# Altium PCB Master.PcbDoc
Units mil, origin at the board's own origin, x right, y up, seen from the top; angles counter-clockwise.
Board outline 6000 x 4000 mil, 2 copper layers (Top Layer, Bottom Layer); 26 components, 32 nets, 130 pads, 0 vias.
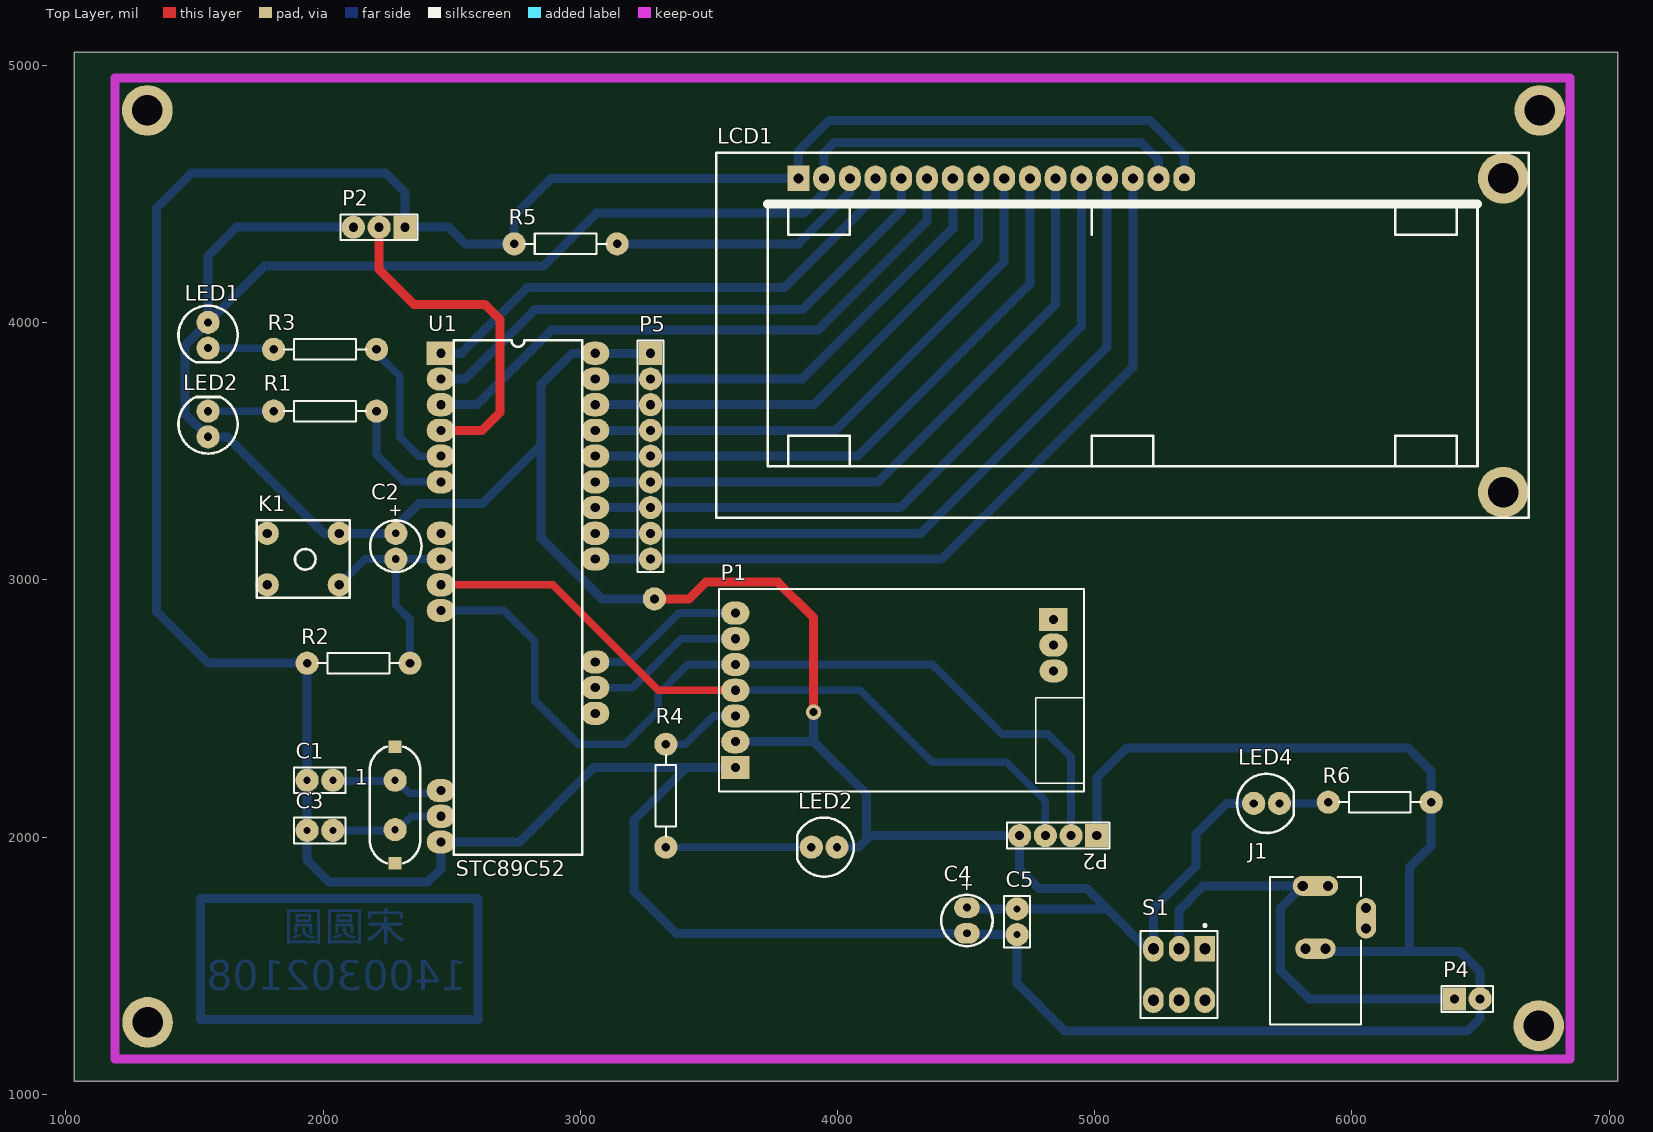
[diagram p0: Top Layer view]
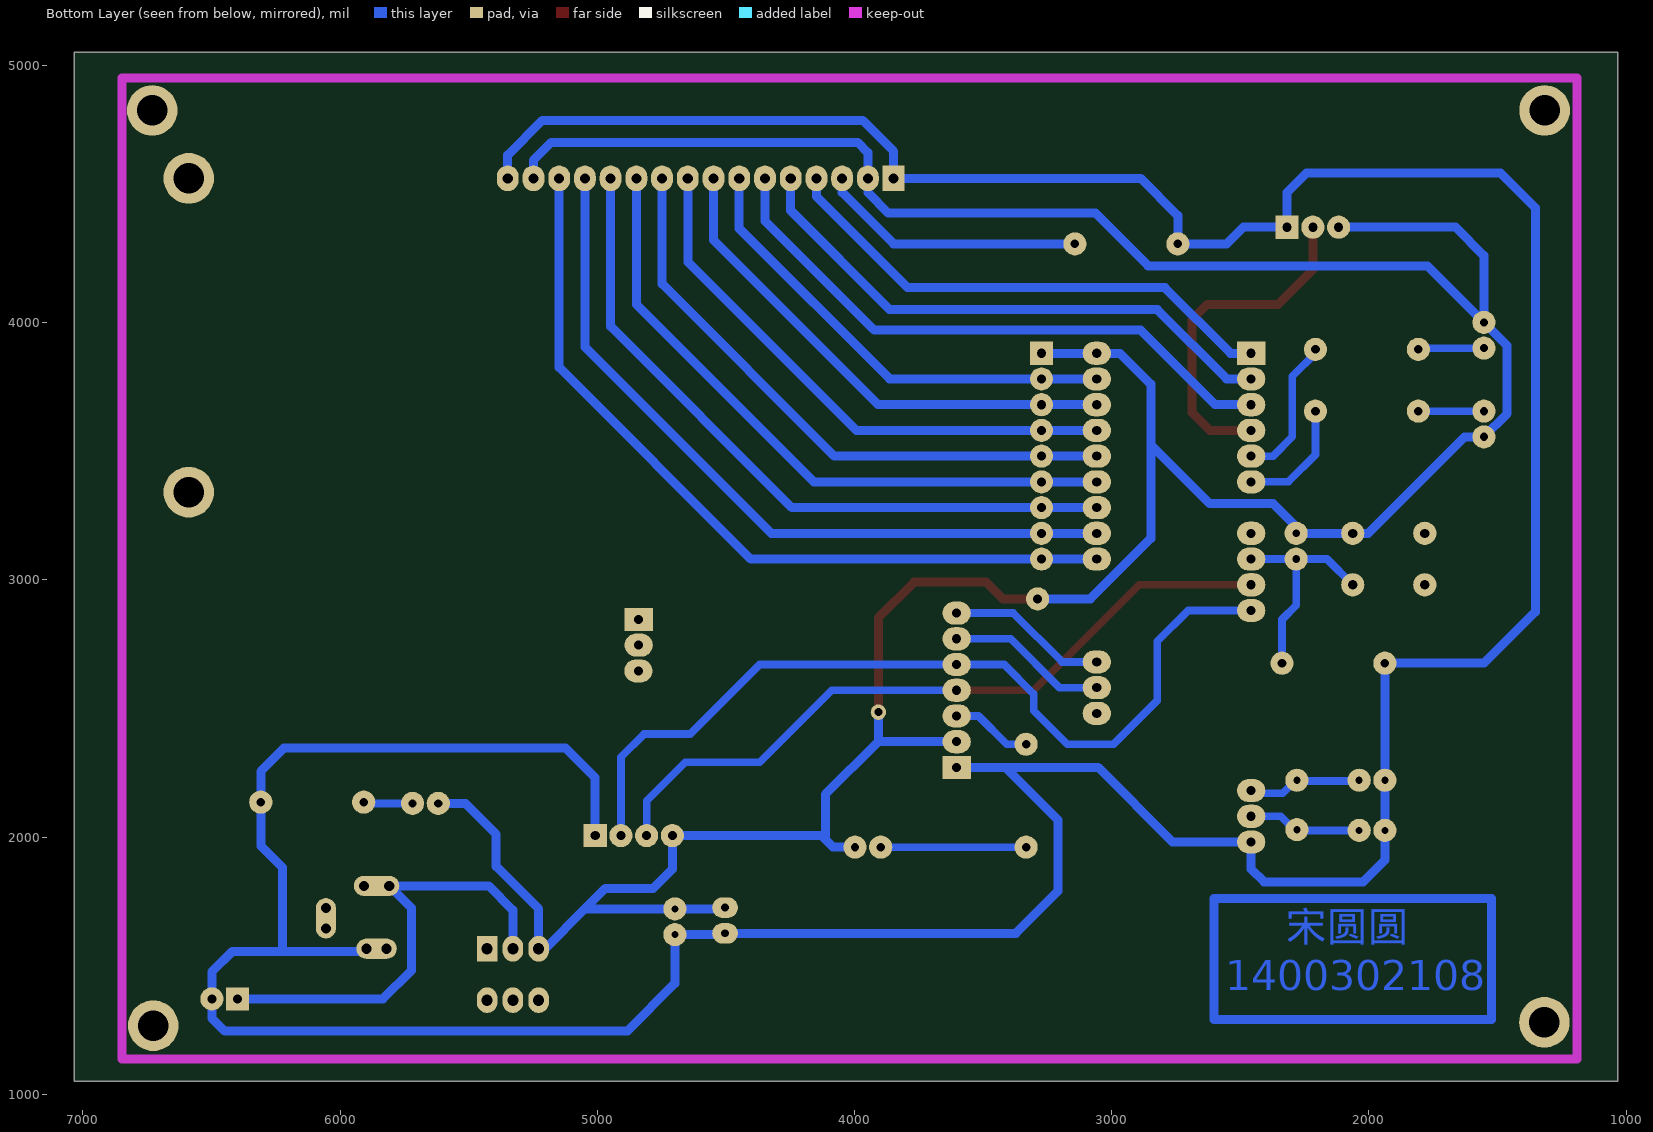
[diagram p1: Bottom Layer view, seen from below]

## Layer stack, top to bottom
Top Layer: signal copper 1.4
Dielectric: dielectric 12.6, FR-4, Dk 4.8
Bottom Layer: signal copper 1.4

## Board outline
1033,1051 7033,1051 7033,5051 1033,5051

## Design rules (kind name [scope] priority, off if disabled: settings)
Clearance [All] p1: gap=10
PolygonConnect [All] p1: connectstyle=Relief reliefconductorwidth=10 reliefentries=4 polygonreliefangle="90 Angle" airgapwidth=10
RoutingVias [All] p1: holewidth=28 width=50 viastyle="Through Hole" minholewidth=28 minwidth=50 maxholewidth=28 maxwidth=50
SolderMaskExpansion [All] p1: expansion=4
Width [All] p1: maxlimit=40 minlimit=10 preferedwidth=30
28 further rules are at their usual default settings.

## Classes and differential pairs
component class Master: 1 C1 C2 C3 C4 C5 J1 K1 LCD1 LED1 LED2 LED4 P2 P4 R1 R2 R3 R4 R5 R6 S1 U1

## Components (designator, comment, footprint, x,y, rotation, side; value= is the part's Value field where it differs from the comment)
1 "XTAL" XTAL_US 2280,2029 r90 top
C1 "Cap" RAD-0.1 1988,2221 r180 top
C2 "Cap Pol1" RB.1/.2#1 2283,3131 r90 top
C3 "Cap" RAD-0.1 1988,2026 r180 top
C4 "Cap Pol1" RB.1/.2#2 4503,1676 r90 top
C5 "Cap" RAD-0.1 4698,1671 r90 top
J1 "PWR2.5" KLD-0202 5858,1271 r90 top
K1 "四脚按键" 四脚按键 2063,3181 r270 top locked
LCD1 "LCD1602" LCD1602 3848,4561 r0 top
LED1 "LED" LED 1553,3556 r90 top
LED2 "LED" LED 3998,1961 r180 top
LED2 "LED" LED 1553,4001 r270 top (schematic designator LED3)
LED4 "LED" LED 5618,2131 r0 top
P1 "无线串口模块" AS32-TTL-100 3603,2271 r0 top
P2 "蜂鸣器" HDR1X3 2318,4371 r180 top
P2 "下载口" HDR1X4 5008,2006 r180 top (schematic designator P6)
P4 "" HDR1X2 6398,1371 r0 top
P5 "Header 9" HDR1X9 3273,3881 r270 top
R1 "Res2" AXIAL-0.4 2008,3656 r180 top
R2 "Res2" AXIAL-0.4 2138,2676 r0 top
R3 "Res2" AXIAL-0.4 2008,3896 r180 top
R4 "Res2" AXIAL-0.4 3333,2161 r270 top
R5 "Res2" AXIAL-0.4 2943,4306 r180 top
R6 "Res2" AXIAL-0.4 6108,2136 r0 top
S1 "SW-DPDT" SWITCH_B1 5328,1466 r270 top
U1 "STC89C52" DIP-40 2458,3881 r0 top

## Footprints (in the part's own frame and the unit in brackets; to place one, negate y for a bottom-side part, rotate by r counter-clockwise, add the part's x,y. Pads: shape width x height; smd on the part's side, far side on the other; paste and mask are expansions set on the pad)
AS32-TTL-100 [mil]
  rect 110x90 hole 35.43 mask+1.97: 1(0,0) 1(1236.22,575.59)
  oval 110x90 hole 35.43 mask+1.97: 2(0,100) 2(1236.22,475.59) 3(0,200) 4(0,300) 5(0,400) 6(0,500) 7(0,600)
  silkscreen extent -63,-94 1355,694
AXIAL-0.4 [mil] "Axial Device, Thru-Hole; 2 Leads; 0.4 in Pin Spacing"
  round 90 hole 33.46: 1(-200,0) 2(200,0)
  silkscreen extent -160,-40 160,40
DIP-40 [mil]
  rect 110x90 hole 35.43: 1(0,0)
  oval 110x90 hole 35.43: 2(0,-100) 3(0,-200) 4(0,-300) 5(0,-400) 6(0,-500) 8(0,-700) 9(0,-800) 10(0,-900) 11(0,-1000) 18(0,-1700) 19(0,-1800) 20(0,-1900) 26(600,-1400) 27(600,-1300) 28(600,-1200) 32(600,-800) 33(600,-700) 34(600,-600) 35(600,-500) 36(600,-400) 37(600,-300) 38(600,-200) 39(600,-100) 40(600,0)
  silkscreen extent 50,-1950 550,50
HDR1X2 [mil] "Connector; Header; 2 Position"
  rect 90x90 hole 35.43: 1(0,0)
  round 90 hole 35.43: 2(100,0)
  silkscreen extent -50,-50 150,50
HDR1X3 [mil] "Connector; Header; 3 Position"
  rect 90x90 hole 35.43: 1(0,0)
  round 90 hole 35.43: 2(100,0) 3(200,0)
  silkscreen extent -50,-50 250,50
HDR1X4 [mil] "Connector; Header; 4 Position"
  rect 90x90 hole 35.43: 1(0,0)
  round 90 hole 35.43: 2(100,0) 3(200,0) 4(300,0)
  silkscreen extent -50,-50 350,50
HDR1X9 [mil] "Connector; Header; 9 Position"
  rect 90x90 hole 35.43: 1(0,0)
  round 90 hole 35.43: 2(100,0) 3(200,0) 4(300,0) 5(400,0) 6(500,0) 7(600,0) 8(700,0) 9(800,0)
  silkscreen extent -50,-50 850,50
KLD-0202 [mm] "DC Power Jack, 2.5mm, KLD Series, PCB Mount"
  oval 2x4.5 all layers, no hole: 1(13.7,0)
  round 1.5 hole 1: 1A(13.7,-1.25) 1B(13.7,1.25) 2A(7.5,-1) 2B(7.5,1) 3A(9.5,-5) 3B(11.5,-5)
  oval 2x4 all layers, no hole: 2(7.5,0)
  oval 4x2 all layers, no hole: 3(10.5,-5)
  silkscreen extent 0,-4.5 14.6,4.5
LCD1602 [mm]
  round 5 hole 3: 0(69.596,-30.988) 0(69.596,0)
  rect 2.159x2.54 hole 1: 1(0,0)
  oval 2.159x2.54 hole 1: 2(2.54,0) 3(5.08,0) 4(7.62,0) 5(10.16,0) 6(12.7,0) 7(15.24,0) 8(17.78,0) 9(20.32,0) 10(22.86,0) 11(25.4,0) 12(27.94,0) 13(30.48,0) 14(33.02,0) 15(35.56,0) 16(38.1,0)
  silkscreen extent -8.13,-33.53 72.14,2.54
LED [mil]
  round 90 hole 32: 1(0,0) 2(100,0)
  silkscreen extent -65,-115 155,115
RAD-0.1 [mil] "Radial Cap, Thru-Hole; 2 Leads; 0.1 in Pin Spacing"
  round 90 hole 27.56: 1(-50,0) 2(50,0)
  silkscreen extent -100,-50 100,50
RB.1/.2#1 [mil]
  round 90 hole 30: 1(50,0) 2(-50,0)
  silkscreen extent -100,-100 100,100
RB.1/.2#2 [mil]
  oval 80x100 hole 30: 1(50,0) 2(-50,0)
  silkscreen extent -100,-100 100,100
SWITCH_B1 [mil] "单刀"
  rect 100x80 hole 43.31: 1(-100,100)
  oval 100x80 hole 43.31: 2(-100,0) 3(-100,-100) 4(100,-100) 5(100,0)
  silkscreen extent -195,-150 169,150
XTAL_US [mil]
  round 90 hole 28: 1(0,0) 2(192.13,0)
  rect 50x50 smd: ""(-130.32,0) ""(322.44,0)
  silkscreen extent -131,-98 323,98
四脚按键 [mil]
  round 90 hole 35.43: 1(0,0) 2(200,0) 3(0,-280) 4(200,-280)
  silkscreen extent -50,-320 250,40

## Part data
1: "Crystal Oscillator"
C1 C3 C5: "Capacitor"
C2 C4: "Polarized Capacitor (Radial)"
J1: "Low Voltage Power Supply Connector"
P1: library part "Header 7", "Header, 7-Pin"
P2: library part "Header 3", "Header, 3-Pin"
P2: library part "Header 4", "Header, 4-Pin"
P4: library part "Header 2", "Header, 2-Pin"
P5: "Header, 9-Pin"
R1 R2 R3 R4 R5 R6: "Resistor"
S1: "单刀双掷开关"
U1: library part STC89C51

## Free pads (board coordinates)
  round 60 hole 30: 0(3907,2486)
  round 196.85 hole 118.11: 1(1317,4825) 2(6730,4825) 3(1318,1280) 4(6726,1267)
  round 90 hole 35: 1(3288,2926)
  oval 110x90 hole 35.43: 3(4840,2646)
  oval 80x100 hole 43.31: 6(5428,1366)

## Nets (pads, with @x,y where several pads share a name; then routed paths per layer and width w, separated by ;. In a path a pad name is that pad's centre, name@x,y a point inside that pad or via, vN(x,y) a via of type N, cw(c..) or ccw(c..) an arc to the next point about the centre after c; other vN are vias at no path point)
5V: J1.1 J1.1A J1.1B P4.1 S1.2 | length 1755.3
  Bottom Layer w35: S1.2 5328,1716 5422.37,1810.37 J1.1B 5723,1724.58 5723,1481 5833,1371 P4.1
AUX: P1.3 R4.1 | length 306.8
  Bottom Layer w30: R4.1@3363,2361 3408,2361 3518,2471 P1.3 P1.3@3588,2486
BEEP: P2.2@2218,4371 U1.4 | length 1324.8
  Top Layer w35: P2.2@2218,4371 2218,4206 2353,4071 2628,4071 2688,4011 2688,3651 2618,3581 U1.4@2468,3581
D0: LCD1.7 P5.2 U1.39 | length 1817.3
  Bottom Layer w35: U1.39@3068,3781 P5.2 3863,3781 4448,4366 LCD1.7
D1: LCD1.8 P5.3 U1.38 | length 1985.1
  Bottom Layer w35: U1.38@3068,3681 P5.3 3908,3681 4548,4321 LCD1.8
D2: LCD1.9 P5.4 U1.37 | length 2176.3
  Bottom Layer w35: U1.37@3068,3581 P5.4 3993,3581 4648,4236 LCD1.9
D3: LCD1.10 P5.5 U1.36 | length 2367.5
  Bottom Layer w35: U1.36@3068,3481 P5.5 4078,3481 4748,4151 LCD1.10
D4: LCD1.11 P5.6 U1.35 | length 2555.8
  Bottom Layer w35: U1.35@3068,3381 P5.6 4158,3381 4848,4071 LCD1.11
D5: LCD1.12 P5.7 U1.34 | length 2747
  Bottom Layer w35: U1.34@3068,3281 P5.7 4243,3281 4948,3986 LCD1.12
D6: LCD1.13 P5.8 U1.33 | length 2935.3
  Bottom Layer w35: U1.33@3068,3181 P5.8 4323,3181 5048,3906 LCD1.13
D7: LCD1.14 P5.9 U1.32 | length 3123.6
  Bottom Layer w35: U1.32@3068,3081 P5.9 4403,3081 5148,3826 LCD1.14
E: LCD1.6 U1.3 | length 2341.2
  Bottom Layer w35: U1.3@2468,3681 2598,3681 2888,3971 3923,3971 4348,4396 LCD1.6
GND: C1.2 C3.2 C4.2 C5.1 J1.2 J1.2A J1.2B LCD1.1 LCD1.16 P1.1@3603,2271 P2.1 P4.2 R2.1 R5.2 R6.2 U1.20 | length 17038.8
  Bottom Layer w35: P1.1@3603,2271 3413,2271 ; P2.1@5008,2006 5008,2231 5123,2346 6218,2346 6308,2256 R6.2 6308,1966 6223,1881 6223,1566 ; LCD1.16@5348,4561.47 5348,4651 5213,4786 3968,4786 3848,4666 LCD1.1 2888,4561 2743,4416 R5.2 2553,4306 2488,4371 2318,4371 2318,4506 2243,4581 1488,4581 1353,4446 1353,2876 1553,2676 R2.1 C1.2 C3.2 1938,1911 2023,1826 2408,1826 2458,1876 U1.20 2763,1981 3053,2271 3413,2271 ; J1.2A 5907.65,1556 6418,1556 6498,1476 P4.2 6498,1296 6448,1246 4883,1246 4698,1431 C5.1 4498,1621 C4.2 3373,1626 3208,1791 3208,2066 3413,2271
LED1: R3.1 U1.5 | length 563.3
  Bottom Layer w30: R3.1@2208,3881 2298,3791 2298,3556 2373,3481 U1.5@2468,3481
LED2: R1.1 U1.6 | length 473.5
  Bottom Layer w30: R1.1 2208,3486 2313,3381 U1.6@2468,3381
M0: P1.7 U1.28 | length 624.1
  Bottom Layer w30: U1.28@3068,2656 3093,2681 3193,2681 3383,2871 P1.7
M1: P1.6 U1.27 | length 624.1
  Bottom Layer w30: U1.27@3068,2556 3093,2581 3203,2581 3393,2771 P1.6
NetC2_2: 
NetJ1_3: 
NetLED1_2: LED2.2@1553,3901 R3.2 | length 250
  Bottom Layer w30: LED2.2@1553,3901 R3.2@1803,3901
NetLED2_2: LED2.2@3898,1961 R4.2 | length 565
  Bottom Layer w30: R4.2 LED2.2@3898,1961
NetLED3_2: LED1.2 R1.2 | length 255
  Bottom Layer w30: LED1.2 R1.2
NetLED4_2: LED4.2 R6.1 | length 185
  Bottom Layer w30: LED4.2 R6.1@5903,2131
RESET: C2.2 K1.2 R2.2 U1.9 | length 874.2
  Bottom Layer w30: K1.2 2163,3081 C2.2 ; R2.2 2338,2846 2283,2901 C2.2 ; U1.9@2468,3081 C2.2
RS: LCD1.4 U1.1 | length 2026.8
  Bottom Layer w30: U1.1@2468,3871 2478,3871 U1.1@2468,3881
  Bottom Layer w35: U1.1@2468,3881 2538,3881 2793,4136 3793,4136 4148,4491 LCD1.4
RW: LCD1.5 U1.2 | length 2176.3
  Bottom Layer w35: U1.2@2468,3781 2553,3781 2823,4051 3863,4051 4248,4436 LCD1.5
RX: P1.4 P2.3@4808,2006 U1.10 | length 2822.9
  Top Layer w30: U1.10@2468,2981 2893,2981 3303,2571 P1.4
  Bottom Layer w30: P1.4 4088,2571 4368,2291 4658,2291 4808,2141 P2.3@4808,2006
TX: P1.5 P2.2@4908,2006 U1.11 | length 3420.7
  Bottom Layer w30: U1.11 2703,2881 2823,2761 2823,2531 2993,2361 3173,2361 3303,2491 3303,2556 3418,2671 P1.5 4368,2671 4638,2401 4818,2401 4908,2311 P2.2@4908,2006
VCC: C2.1 C4.1 C5.2 K1.1 LCD1.2 LCD1.15 LED1.1 LED2.1 LED4.1 P1.2@3603,2371 P2.3@2118,4371 P2.4 P5.1 pad.0 pad.1@3288,2926 S1.3 U1.40 | length 13556.3
  Top Layer w35: pad.1@3288,2926 3423,2926 3488,2991 3768,2991 3907,2852 pad.0 ; C4.1 C4.1@4508,1721
  Bottom Layer w35: P2.3@2118,4371 1663,4371 1553,4261 LED2.1@1553,4001 ; C2.1 K1.1 2003,3181 1628,3556 LED1.1 1463,3646 1463,3911 LED2.1@1553,4001 ; C2.1@2283,3206 2373,3296 2618,3296 2848,3526 ; P5.1 2968,3881 2848,3761 2848,3526 ; pad.1@3288,2926 3083,2926 2848,3161 2848,3526 ; P1.2@3603,2371 3908,2371 ; pad.0 3907,2372 3908,2371 ; LED2.1@3998,1961 4083,1961 4113,1991 ; C4.1@4508,1721 C5.2 5048,1721 ; LCD1.15@5248,4561.47 5248,4631 5178,4701 3988,4701 3948,4661 LCD1.2 3948,4506 3868,4426 3063,4426 2858,4221 1773,4221 LED2.1@1553,4001 ; LED4.1 5513,2131 5393,2011 5393,1886 5228,1721 S1.3 5203,1566 5048,1721 ; 3908,2371 4113,2166 4113,1991 ; 4113,1991 4128,2006 P2.4 4708,1876 4783,1801 4968,1801 5048,1721
VO: LCD1.3 R5.1 | length 1043.3
  Bottom Layer w35: R5.1 3848,4306 4048,4506 LCD1.3 LCD1.3@4048,4560.53
XTAL1: 1.1 C3.1 U1.19 | length 452.8
  Bottom Layer w30: C3.1 2288,2026 2343,2081 U1.19@2468,2081
XTAL2: 1.2 C1.1 U1.18 | length 454.9
  Bottom Layer w30: C1.1 2040.87,2218.13 2288,2218.13 2335.12,2171 2458,2171 U1.18@2468,2181
pads on no net: 1. J1.3 J1.3A J1.3B K1.3 K1.4 LCD1.0 P1.1@4839.22,2846.59 P1.2@4839.22,2746.59 S1.1 S1.4 S1.5 U1.8 U1.26
copper on no net: | length 3135
  Bottom Layer w35: 1523,1311 1523,1291 ; 2603,1691 2603,1761 1523,1761 1523,1291 ; 2603,1706 2603,1291 1563,1291 1523,1291

## Keep-outs
Keep-Out Layer:
  lines w35: 1192,1138 1192,4951 6848,4951 6848,1138 1192,1138

## Other copper
Bottom Layer:
  text "宋圆圆" at 2323,1556 h200
  text "1400302108" at 2558,1366 h200

## Dimensions
1192,4951 to 1192,1138 on Top Overlay
1192,1138 to 6848,1138 on Top Overlay

## Text inside footprints (layer, text, board x,y; h text height)
C2: Top Overlay "+" at 2303,3241 h48 r90
C4: Top Overlay "+" at 4523,1786 h48 r90
J1: Mechanical 1 "Mech 2 - Clearance, move to internal plane if present" at 5658.56,1282.26 h11.81 r90; Mechanical 1 "Mech 1 - Slot cut-out" at 5638.87,1282.26 h11.81 r90; Mechanical 1 "Assign keep-out area to slot" at 5599.5,1282.26 h11.81 r90; Mechanical 1 "Alert PCB fab to slot details" at 5619.19,1282.26 h11.81 r90